# Altium PCB chess_module.PcbDoc
Units mil, origin at the board's own origin, x right, y up, seen from the top; angles counter-clockwise.
Board outline 5000 x 5000 mil, 2 copper layers (Top Layer, Bottom Layer); 52 components, 35 nets, 126 pads, 45 vias.
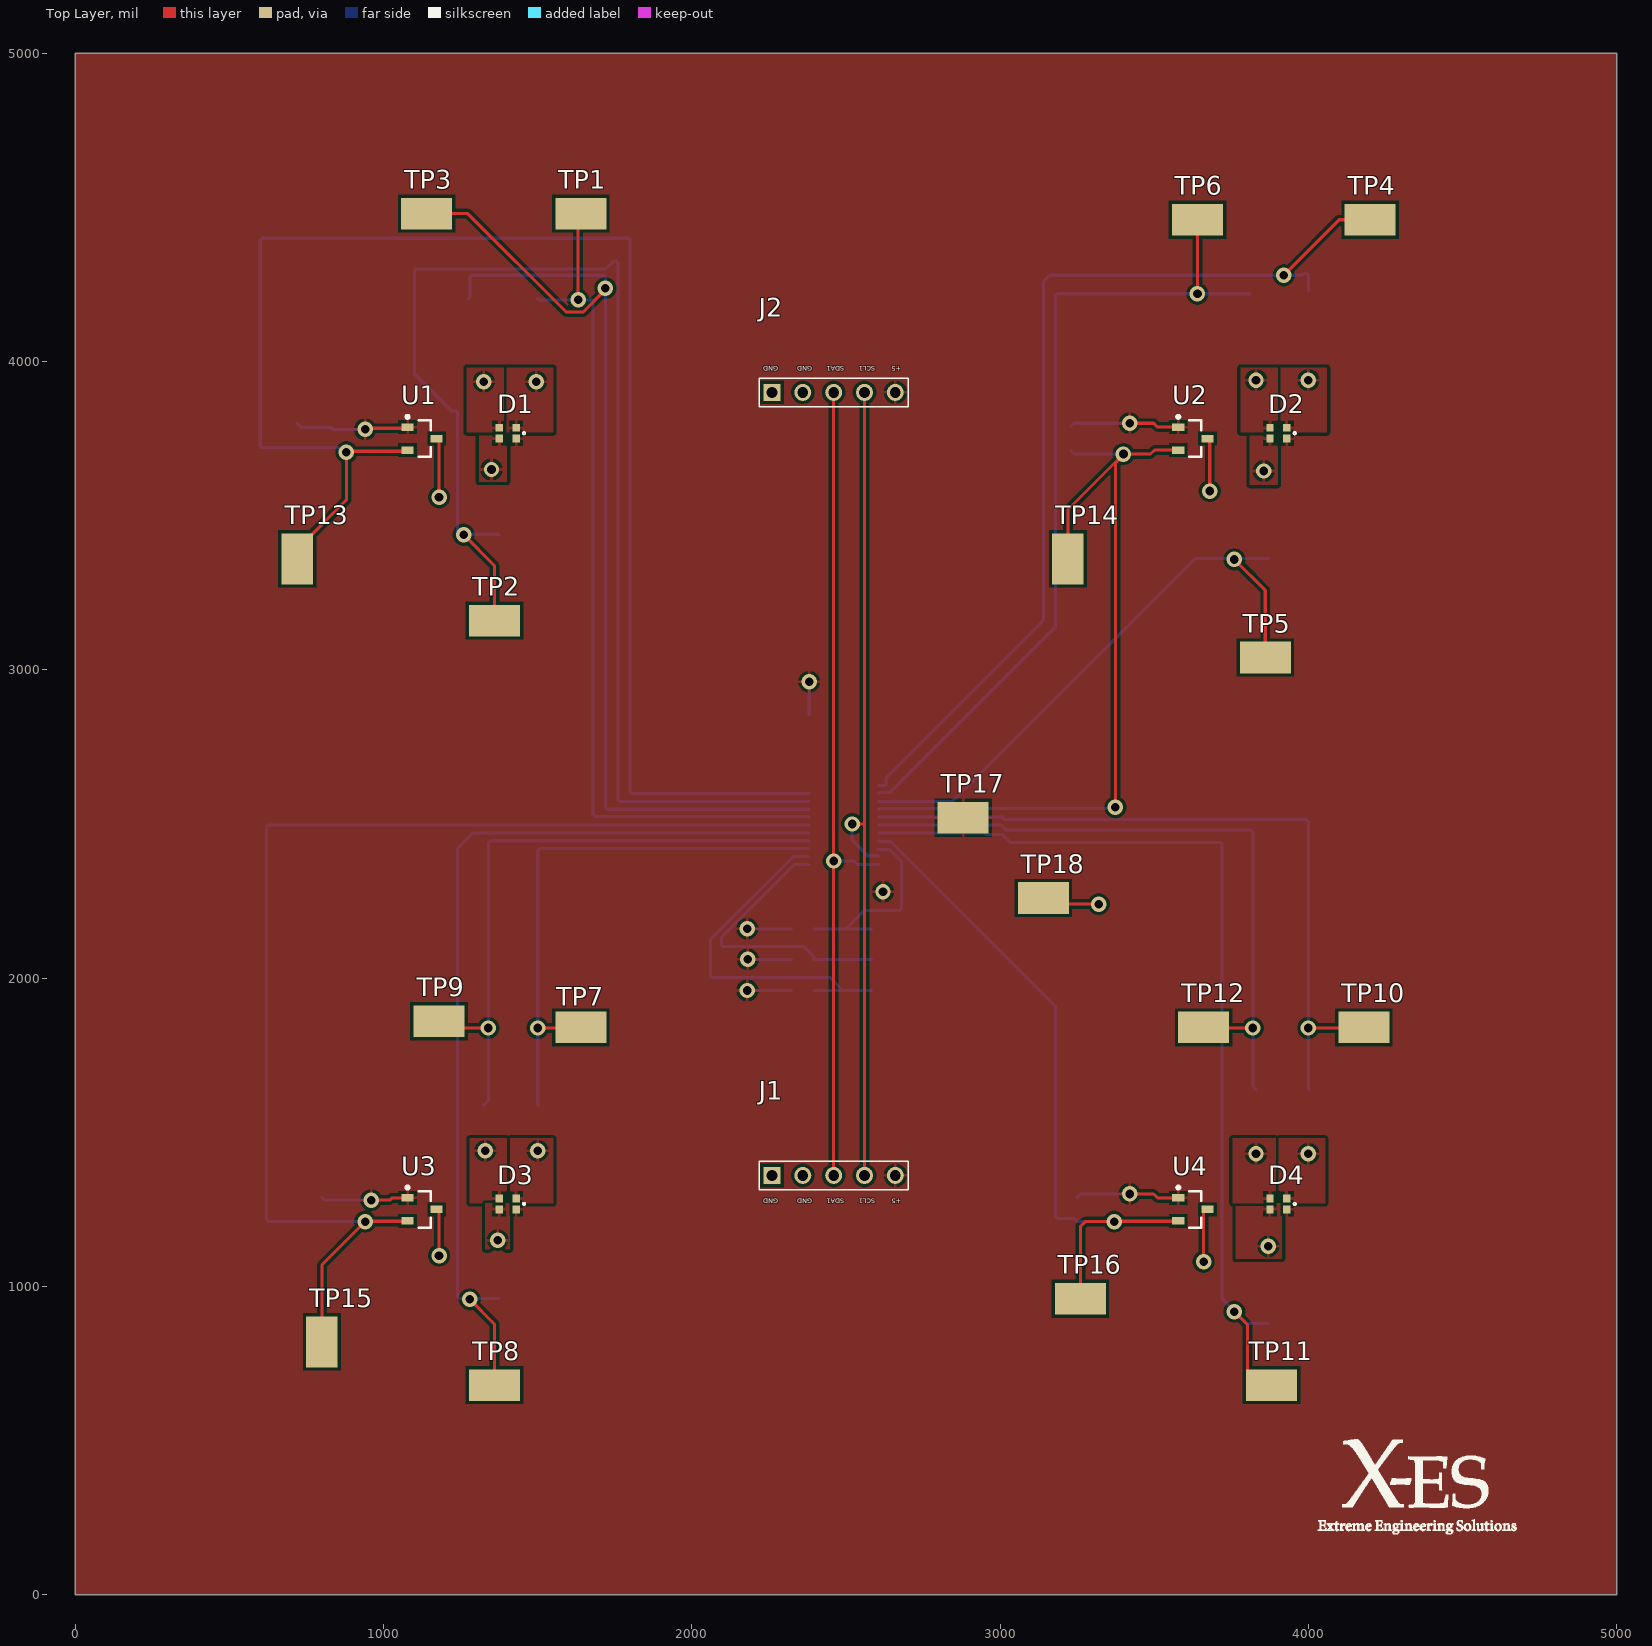
[diagram p0: Top Layer view]
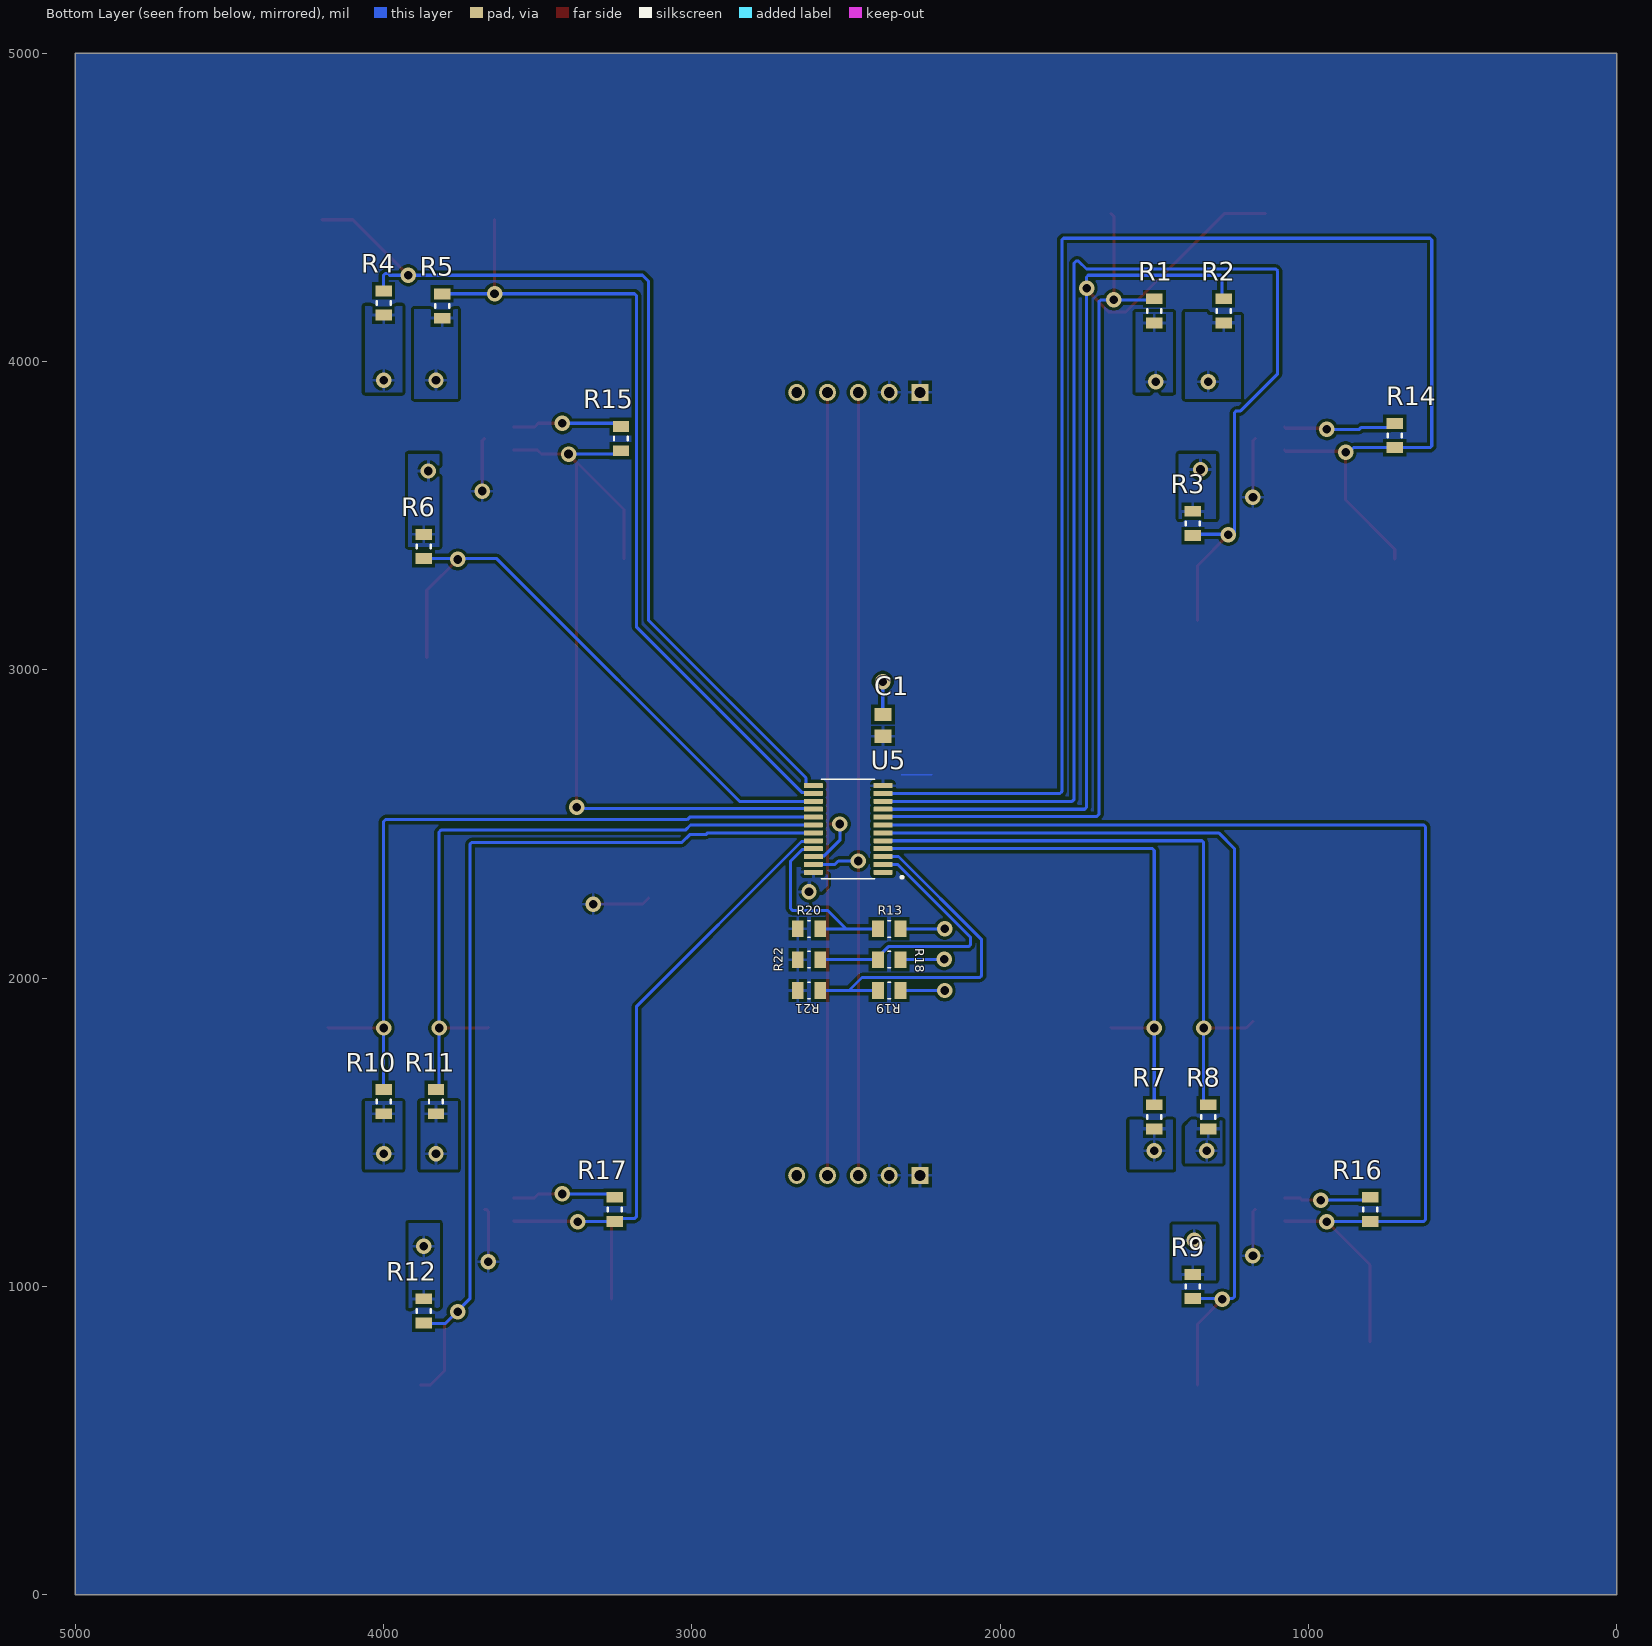
[diagram p1: Bottom Layer view, seen from below]
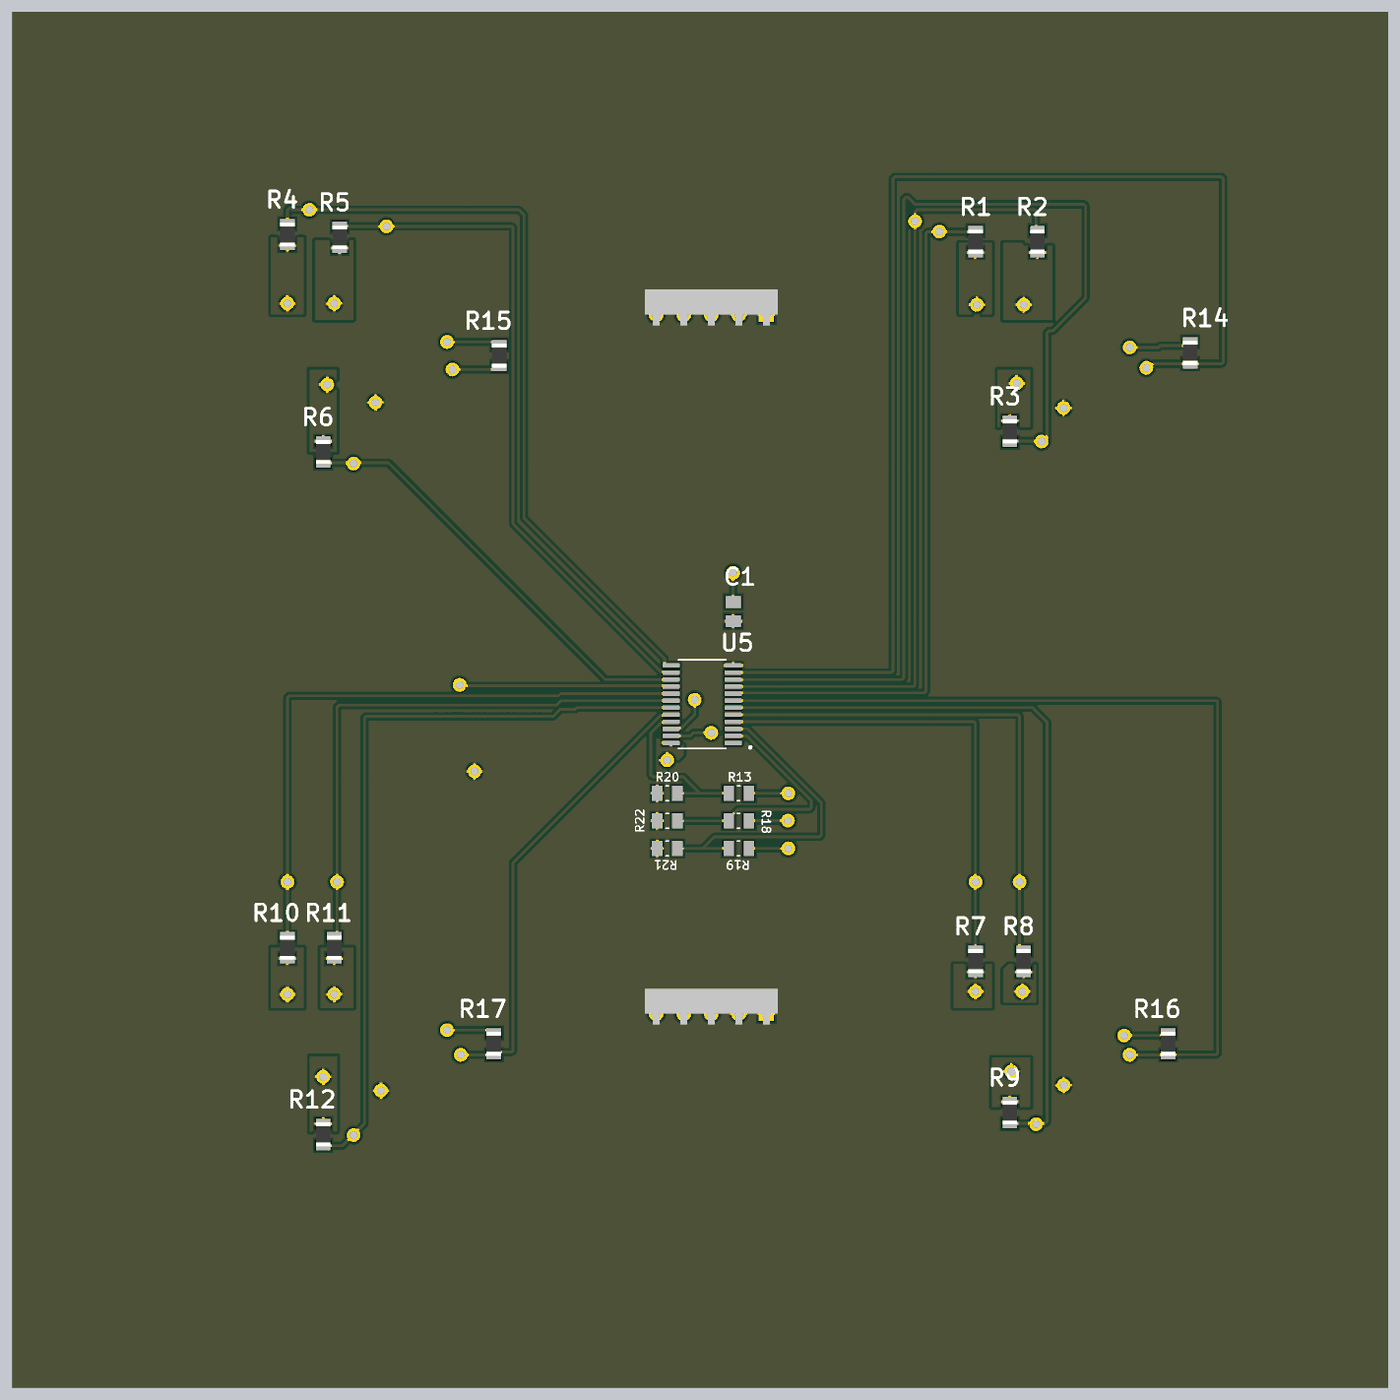
[diagram p2: 3D render of the assembled board from below, using the file's embedded part models]

## Layer stack, top to bottom
Top Solder: solder mask 0.4, Solder Resist, Dk 3.5
Top Layer: signal copper 1.4
Dielectric 1: dielectric 12.6, FR-4, Dk 4.8
Bottom Layer: signal copper 1.4
Bottom Solder: solder mask 0.4, Solder Resist, Dk 3.5

## Board outline
0,0 5000,0 5000,5000 0,5000

## Design rules (kind name [scope] priority, off if disabled: settings)
Clearance [All] p1: gap=10 ignorepadtopadclearanceinfootprint=TRUE except(0: Arc-Hole Track-Hole SMDPad-Hole THPad-Hole Via-Hole Fill-Hole Poly-Hole Region-Hole Text-Hole)
PolygonConnect [All] p1: connectstyle=Relief reliefconductorwidth=10 reliefentries=4 polygonreliefangle="90 Angle" airgapwidth=10
RoutingVias [All] p1: holewidth=28 width=50 viastyle="Through Hole" minholewidth=28 minwidth=50 maxholewidth=28 maxwidth=50
SolderMaskExpansion [All] p1: expansion=4 istentingtop=FALSE
Width [All] p1: maxlimit=10 minlimit=10 preferedwidth=10
30 further rules are at their usual default settings.

## Classes and differential pairs
component class chess_module_LEDs: D1 D2 D3 D4 R1 R2 R3 R4 R5 R6 R7 R8 R9 R10 R11 R12 TP1 TP2 TP3 TP4 TP5 TP6 TP7 TP8 TP9 TP10 TP11 TP12
component class chess_module_HEF: R14 R15 R16 R17 TP13 TP14 TP15 TP16 U1 U2 U3 U4
component class chess_module_connectors: C1 J1 J2 R13 R18 R19 R20 R21 R22 TP17 TP18 U5

## Components (designator, comment, footprint, x,y, rotation, side; value= is the part's Value field where it differs from the comment)
C1 "CL21A106KOQNNNG" CAPC2012X140N 2380,2820 r90 bottom
D1 "EAST1616RGBA2" EAST1616RGBA2 1375,3750 r0 top
D2 "EAST1616RGBA2" EAST1616RGBA2 3875,3750 r0 top
D3 "EAST1616RGBA2" EAST1616RGBA2 1375,1250 r0 top
D4 "EAST1616RGBA2" EAST1616RGBA2 3875,1250 r0 top
J1 "87224-5" TE_87224-5 2460,1360 r0 top
J2 "87224-5" TE_87224-5 2460,3900 r0 top
R1 "510" SMD-0805-RES 1500,4164.37 r270 bottom
R2 "243" SMD-0805-RES 1275,4164.37 r270 bottom
R3 "243" SMD-0805-RES 1375,3475 r270 bottom
R4 "510" SMD-0805-RES 4000,4190 r270 bottom
R5 "243" SMD-0805-RES 3810,4180 r270 bottom
R6 "243" SMD-0805-RES 3870,3400 r270 bottom
R7 "510" SMD-0805-RES 1500,1550 r270 bottom
R8 "243" SMD-0805-RES 1325,1550 r270 bottom
R9 "243" SMD-0805-RES 1375,1000 r270 bottom
R10 "510" SMD-0805-RES 4000,1599.37 r270 bottom
R11 "243" SMD-0805-RES 3830,1599.37 r270 bottom
R12 "243" SMD-0805-RES 3870,920.63 r270 bottom
R13 "RMCF0805ZT0R00" RESC2012X60N 2360,2160 r180 bottom
R14 "510" SMD-0805-RES 720,3760 r270 bottom
R15 "510" SMD-0805-RES 3230,3750 r270 bottom
R16 "510" SMD-0805-RES 800,1250 r270 bottom
R17 "510" SMD-0805-RES 3250,1250 r270 bottom
R18 "RMCF0805ZT0R00" RESC2012X60N 2360,2060 r180 bottom
R19 "RMCF0805ZT0R00" RESC2012X60N 2360,1960 r0 bottom
R20 "RMCF0805ZT0R00" RESC2012X60N 2620,2160 r0 bottom
R21 "RMCF0805ZT0R00" RESC2012X60N 2620,1960 r0 bottom
R22 "RMCF0805ZT0R00" RESC2012X60N 2620,2060 r0 bottom
TP1 "TP_1206" TP-SMC-1206 1640,4480 r0 top
TP2 "TP_1206" TP-SMC-1206 1360,3160 r0 top
TP3 "TP_1206" TP-SMC-1206 1140,4480 r0 top
TP4 "TP_1206" TP-SMC-1206 4200,4460 r0 top
TP5 "TP_1206" TP-SMC-1206 3860,3040 r0 top
TP6 "TP_1206" TP-SMC-1206 3640,4460 r0 top
TP7 "TP_1206" TP-SMC-1206 1640,1840 r0 top
TP8 "TP_1206" TP-SMC-1206 1360,680 r0 top
TP9 "TP_1206" TP-SMC-1206 1180,1860 r0 top
TP10 "TP_1206" TP-SMC-1206 4180,1840 r180 top
TP11 "TP_1206" TP-SMC-1206 3880,680 r0 top
TP12 "TP_1206" TP-SMC-1206 3660,1840 r180 top
TP13 "TP_1206" TP-SMC-1206 720,3360 r270 top
TP14 "TP_1206" TP-SMC-1206 3220,3360 r90 top
TP15 "TP_1206" TP-SMC-1206 800,820 r270 top
TP16 "TP_1206" TP-SMC-1206 3260,960 r180 top
TP17 "TP_1206" TP-SMC-1206 2880,2520 r180 top
TP18 "TP_1206" TP-SMC-1206 3140,2260 r180 top
U1 "TLV4961-1M" SOT95P245X110-3N 1125,3750 r0 top
U2 "TLV4961-1M" SOT95P245X110-3N 3625,3750 r0 top
U3 "TLV4961-1M" SOT95P245X110-3N 1125,1250 r0 top
U4 "TLV4961-1M" SOT95P245X110-3N 3625,1250 r0 top
U5 "TCA9535PWR" SOP65P640X120-24N 2492.99,2483.98 r0 bottom

## Footprints (in the part's own frame and the unit in brackets; to place one, negate y for a bottom-side part, rotate by r counter-clockwise, add the part's x,y. Pads: shape width x height; smd on the part's side, far side on the other; paste and mask are expansions set on the pad)
CAPC2012X140N [mm]
  rect 1.1x1.43 smd: 1(-0.888,0) 2(0.888,0)
EAST1616RGBA2 [mm] "EAST1616RGBA2 RBG LED"
  rect 0.6x0.65 smd: 1(1.4,0.9) 2(0,0.9) 3(1.4,0) 4(0,0)
  silkscreen extent 1.95,0.35 2.15,0.55
RESC2012X60N [mm]
  rect 0.97x1.38 smd: 1(-0.93,0) 2(0.93,0)
  silkscreen extent -0.12,-0.68 0.12,0.68
SMD-0805-RES [mm]
  rect 0.9x1.35 smd: 1(-1,0) 2(1,0)
  silkscreen extent -0.15,-0.58 0.15,0.58, body extent -1.1,-0.67 1.1,0.67, height 0.5
SOP65P640X120-24N [mm]
  rrect25% 1.57x0.41 smd: 1(-2.87,3.575) 2(-2.87,2.925) 3(-2.87,2.275) 4(-2.87,1.625) 5(-2.87,0.975) 6(-2.87,0.325) 7(-2.87,-0.325) 8(-2.87,-0.975) 9(-2.87,-1.625) 10(-2.87,-2.275) 11(-2.87,-2.925) 12(-2.87,-3.575) 13(2.87,-3.575) 14(2.87,-2.925) 15(2.87,-2.275) 16(2.87,-1.625) 17(2.87,-0.975) 18(2.87,-0.325) 19(2.87,0.325) 20(2.87,0.975) 21(2.87,1.625) 22(2.87,2.275) 23(2.87,2.925) 24(2.87,3.575)
  silkscreen extent -4.54,-4.1 2.2,4.1
SOT95P245X110-3N [mm] "SOT23, 3-Leads, Body 2.90x2.45mm, Pitch 0.95mm, IPC Medium Density"
  rect 1x0.6 smd: 1(-1.2,0.95) 2(-1.2,-0.95) 3(1.2,0)
  silkscreen extent -1.32,-1.5 0.7,1.92, body extent -0.7,-1.5 0.7,1.5, height 1.1
TE_87224-5 [mil]
  rect 55x55 hole 35: 1(-200,0)
  round 55 hole 35: 2(-100,0) 3(0,0) 4(100,0) 5(200,0)
  silkscreen extent -242,-46 242,46, body extent -242,-318 242,215, height 46
TP-SMC-1206 [mm]
  rect 4.2x2.6 smd mask+0: 1(0,0)
  body extent -1.57,-0.79 1.63,0.81, height 1.22

## Part data
C1: "10ÂµF Â±10% 16V Ceramic Capacitor X5R 0805 _2012 Metric_", Package="0805 Samsung", Digi-Key_Part_Number=1276-6455-1-ND, Digi-Key_Purchase_URL=https://www.digikey.com/product-detail/en/samsung-electro-mechanics/CL21A106KOQNNNG/1276-6455-1-ND/5958083?utm_source=snapeda&utm_medium=aggregator&utm_campaign=symbol, MF="Samsung Electro-Mechanics", MP=CL21A106KOQNNNG, SnapEDA_Link=https://www.snapeda.com/parts/CL21A106KOQNNNG/Samsung%20Electro-Mechanics/view-part/3597829/?ref=snap
J1 J2: "Conn Unshrouded Header HDR 5 POS 2.54mm Solder ST Thru-Hole", Package=None, Availability=Good, Centerline_Pitch="2.54 mm[.1 in]", EU_RoHS_Compliance=Compliant, MF="TE Connectivity", MP=87224-5, Number_of_Positions=5, Price=None, Product_Type=Connector, Purchase-URL=https://pricing.snapeda.com/search/part/87224-5/?ref=eda, SnapEDA_Link=https://www.snapeda.com/parts/87224-5/TE%20Connectivity%20AMP%20Connectors/view-part/1233389/?ref=snap
R1 R4 R7 R10 R14 R15 R16 R17: library part ERJ-6ENF5100V, "RES SMD 510 OHM 1% 1/8W 0805", Digi-Key Part Number=P510CCT-ND, Manufacturer="Panasonic Electronic Components", Operating Temperature="-55°C ~ 155°C", Package / Case="0805 (2012 Metric)", Power (Watts)="0.125W, 1/8W", Supplier Device Package=0805, Temperature Coefficient=±100ppm/°C, Tolerance=±1%, @ qty=1500, Composition="Thick Film", Datasheets=http://industrial.panasonic.com/www-cgi/jvcr13pz.cgi?E+PZ+3+AOA0002+ERJ6ENF5100V+7+WW, Factory Stock=0, Failure Rate=-, Features="Automotive AEC-Q200", Height - Seated (Max)="0.028\" (0.70mm)", Image=//media.digikey.com/Renders/Panasonic%20Renders/ERJ-0805%20Pkg.jpg, Minimum Quantity=1, Number of Terminations=2, Packaging="Cut Tape (CT)", Part Number=ERJ-6ENF5100V, Part Status=Active, Quantity Available=80206, Series=ERJ, Size / Dimension="0.079\" L x 0.049\" W (2.00mm x 1.25mm)", Unit Price (USD)=0.00729
R2 R3 R5 R6 R8 R9 R11 R12: library part ERJ-6ENF2430V, "RES SMD 243 OHM 1% 1/8W 0805", Digi-Key Part Number=P243CCT-ND, Manufacturer="Panasonic Electronic Components", Operating Temperature="-55°C ~ 155°C", Package / Case="0805 (2012 Metric)", Power (Watts)="0.125W, 1/8W", Supplier Device Package=0805, Temperature Coefficient=±100ppm/°C, Tolerance=±1%, @ qty=1500, Composition="Thick Film", Datasheets=http://industrial.panasonic.com/www-cgi/jvcr13pz.cgi?E+PZ+3+AOA0002+ERJ6ENF2430V+7+WW, Factory Stock=0, Failure Rate=-, Features="Automotive AEC-Q200", Height - Seated (Max)="0.028\" (0.70mm)", Image=//media.digikey.com/Renders/Panasonic%20Renders/ERJ-0805%20Pkg.jpg, Minimum Quantity=1, Number of Terminations=2, Packaging="Cut Tape (CT)", Part Number=ERJ-6ENF2430V, Part Status=Active, Quantity Available=46150, Series=ERJ, Size / Dimension="0.079\" L x 0.049\" W (2.00mm x 1.25mm)", Unit Price (USD)=0.00729
R13 R18 R19 R20 R21 R22: "0 Ohms Jumper 0.125W, 1/8W Chip Resistor 0805 (2012 Metric) Automotive AEC-Q200 Thick Film", Package="0805 Stackpole Electronics", Availability=Unavailable, DigiKey-Purchase-URL=https://snapeda.com/shop?store=DigiKey&id=492501, MF="Stackpole Electronics", MP=RMCF0805ZT0R00, Price=None, SnapEDA_Link=https://www.snapeda.com/parts/RMCF0805ZT0R00/Stackpole%20Electronics%20Inc/view-part/492501/?ref=snap
TP1 TP2 TP3 TP4 TP5 TP6 TP7 TP8 TP9 TP10 TP11 TP12 TP13 TP14 TP15 TP16 TP17 TP18: "Test Point SMD 1206", Case Size=1206, Manufacturer="TE Connectivity (Tyco Electronics)", Manufacturer Part Number=1625854-1, Operating Temperature="-55 to 125 C", Power Rating=N/R, Resistance Value="0 Ohm", Supplier Part Number=A106143CT-ND, ComponentLink1Description=https://datasheet.ciiva.com/6439/eng-ds-1773266-a-6439169.pdf, ComponentLink1URL=https://datasheet.ciiva.com/6439/eng-ds-1773266-a-6439169.pdf, ComponentLink2Description=https://datasheet.ciiva.com/30136/1773266-a-30136341.pdf, ComponentLink2URL=https://datasheet.ciiva.com/30136/1773266-a-30136341.pdf, ComponentLink3Description=https://datasheet.ciiva.com/6439/eng-ds-1773266-a-6439080.pdf, ComponentLink3URL=https://datasheet.ciiva.com/6439/eng-ds-1773266-a-6439080.pdf, ComponentLink4Description=https://datasheet.ciiva.com/6439/eng-ds-1773266-a-6439081.pdf, ComponentLink4URL=https://datasheet.ciiva.com/6439/eng-ds-1773266-a-6439081.pdf, ComponentLink5Description=https://datasheet.ciiva.com/6439/eng-ds-1773266-a-6439083.pdf, ComponentLink5URL=https://datasheet.ciiva.com/6439/eng-ds-1773266-a-6439083.pdf, Dimension="3.2 x 1.6 x 1.25mm", Family=RC, Mounting="Surface Mount", Packaging="Tape and Reel", Part No=1625854-1, Pricing 1="1=0.28, 10=0.261, 25=0.224, 50=0.1902, 100=0.1828, 250=0.1641, 500=0.1567, 1000=0.1306 (USD)", RoHS=Yes, Stock 1=31937, Supplier=Digi-Key, Temperature Coefficient=N/R, Terminal Pitch=N/R, Termination Style=N/R, Tolerance=N/R
U1 U2 U3 U4: "Hall Effect Sensor"
U5: "Remote 16-Bit I2C and SMBus, Low-Power I/O Expander With Interrupt Output and Config Registers 24-TSSOP -40 to 85", Package="TSSOP-24 Texas Instruments", Arrow_Electronics-Purchase-URL=https://snapeda.com/shop?store=Arrow+Electronics&id=1237891, Availability=Good, DigiKey-Purchase-URL=https://snapeda.com/shop?store=DigiKey&id=1237891, MF="Texas Instruments", Mouser-Purchase-URL=https://snapeda.com/shop?store=Mouser&id=1237891, MP=TCA9535PWR, Price=None, SnapEDA_Link=https://www.snapeda.com/parts/TCA9535PWR/Texas%20Instruments/view-part/1237891/?ref=snap, Texas_Instruments-Purchase-URL=https://snapeda.com/shop?store=Texas+Instruments&id=1237891

## Via types
v1: diameter 50, hole 28, Top Layer to Bottom Layer, 45 vias

## Nets (pads, with @x,y where several pads share a name; then routed paths per layer and width w, separated by ;. In a path a pad name is that pad's centre, name@x,y a point inside that pad or via, vN(x,y) a via of type N, cw(c..) or ccw(c..) an arc to the next point about the centre after c; other vN are vias at no path point)
+5: C1.2 D1.3 D2.3 D3.3 D4.3 J1.5 J2.5 R13.2 R14.1 R15.1 R16.1 R17.1 R18.2 R19.1 TP17.1 U1.1 U2.1 U3.1 U4.1 U5.24 | length 1883.8
  Top Layer w10: v1(940,3780) 943.7,3783.7 1074.06,3783.7 U1.1 ; v1(960,1280) 1020.48,1280 1027.88,1287.4 U3.1 ; v1(3420,1300) 3497.88,1300 3510.48,1287.4 U4.1 ; v1(3420,3800) 3497.88,3800 3510.48,3787.4 U2.1
  Bottom Layer w10: R14.1 732.72,3786.65 828.22,3786.65 834.88,3780 v1(940,3780) ; R16.1 809.37,1280 v1(960,1280) ; v1(2180,1960) R19.1 ; v1(2180,2160) R13.2 ; v1(2181.61,2060.75) 2322.63,2060.75 R18.2 ; C1.2 2380.76,2855.72 v1(2380.76,2961.33) ; R15.1 3240.63,3800 v1(3420,3800) ; R17.1 3260.63,1300 v1(3420,1300)
  other v1: 2620,2280
A0: R13.1 R20.1 U5.21 | length 639.9
  Bottom Layer w10: R13.1 2500,2160 ; R20.1 2500,2160 ; U5.21@2603.46,2417.48 2641.92,2417.48 2680,2379.4 2680,2225.86 2674.14,2220 2560,2220 2500,2160
A1: R18.1 R22.1 U5.2 | length 918
  Bottom Layer w10: U5.2 2332.25,2368.82 2096.31,2132.88 2096.31,2108.02 2102.17,2102.17 2362.52,2102.17 2396.61,2068.07 R18.1 R22.1
A2: R19.2 R21.1 U5.3 | length 1185.1
  Bottom Layer w10: U5.3 2329.56,2394.41 2060,2124.85 2060,2008.02 2065.86,2002.17 2447.83,2002.17 2490,1960 ; R19.2 2490,1960 ; R21.1 2490,1960
BD1: D1.4 R3.1
  other v1: 1350,3650
BD1_OUT: R3.2 TP2.1 U5.10 | length 4411.8
  Top Layer w10: v1(1259.57,3438.14) 1360,3337.72 TP2.1
  Bottom Layer w10: R3.2 1370.63,3440 1245.86,3440 1240,3445.86 1240,3834.14 1234.14,3840 1220,3840 1100,3960 1100,4294.14 1105.86,4300 1720,4300 1745.86,4325.86 1754.14,4325.86 1760,4320 1760,2580 1766.46,2573.54 U5.10
BD2: D2.4 R6.1
  other v1: 3855,3645
BD2_OUT: R6.2 TP5.1 U5.15 | length 1949.8
  Top Layer w10: v1(3759.57,3358.14) 3860,3257.72 TP5.1
  Bottom Layer w10: U5.15 2845.35,2573.54 3632.44,3360.63 R6.2
BD3: D3.4 R9.1
  other v1: 1370,1150
BD3_OUT: R9.2 TP8.1 U5.6 | length 3063.6
  Top Layer w10: v1(1279.57,958.14) 1360,877.72 TP8.1
  Bottom Layer w10: R9.2 1245.86,960.63 1240,966.49 1240,2420 1291.18,2471.18 U5.6
BD4: D4.4 R12.1
  other v1: 3870,1130
BD4_OUT: R12.2 TP11.1 U5.19 | length 3091.9
  Top Layer w10: v1(3759.57,918.14) 3802.32,875.4 3802.32,726.18 3848.5,680 TP11.1
  Bottom Layer w10: U5.19 2948.82,2471.18 2954.41,2465.59 3007.23,2465.59 3032.82,2440 3714.14,2440 3720,2434.14 3720,960 3800,880 R12.2@3868.74,880
GD1: D1.2 R2.2
  other v1: 1325,3935
GD1_OUT: R2.1 TP3.1 U5.9 | length 3647.1
  Top Layer w10: TP3.1 1273.16,4480 1592.29,4160.87 1647.77,4160.87 1719.57,4232.67 v1(1719.57,4238.14)
  Bottom Layer w10: R2.1 1280,4208.74 1280,4274.14 1285.86,4280 1714.14,4280 1720,4274.14 1720,2553.81 1725.86,2547.95 U5.9
GD2: D2.2 R5.2
  other v1: 3830,3940
GD2_OUT: R5.1 TP6.1 U5.14 | length 2745
  Top Layer w10: v1(3640,4220) TP6.1
  Bottom Layer w10: U5.14 2608.5,2601.65 2641.92,2601.65 3180,3139.73 3180,4214.14 3185.86,4220 v1(3640,4220) 3809.37,4220 R5.1
GD3: D3.2 R8.2
  other v1: 1330,1440
GD3_OUT: R8.1 TP9.1 U5.5 | length 2069
  Top Layer w10: TP9.1 1201.86,1838.14 v1(1339.57,1838.14)
  Bottom Layer w10: R8.1 1327.28,1589.37 1340,1602.09 1340,2439.73 1345.86,2445.59 U5.5
GD4: D4.2 R11.2
  other v1: 3830,1430
GD4_OUT: R11.1 TP12.1 U5.18 | length 2223.3
  Top Layer w10: TP12.1 3661.86,1838.14 v1(3819.57,1838.14)
  Bottom Layer w10: U5.18 3004.33,2496.77 3021.1,2480 3814.14,2480 3820,2474.14 3820,1648.74 R11.1
GND: C1.1 J1.1 J1.2 J2.1 J2.2 R20.2 R21.2 R22.2 TP18.1 U1.3 U2.3 U3.3 U4.3 U5.12 | length 887.8
  Top Layer w10: U3.3 1173.19,1250 1180,1243.19 v1(1180,1100) ; U1.3 1173.19,3750 1180,3743.19 v1(1180,3560) ; TP18.1 3160,2240 v1(3320,2240) ; v1(3660,1080) 3660,1243.19 3666.81,1250 U4.3 ; U2.3 3673.19,3750 3680,3743.19 v1(3680,3580)
HEF1_OUT: R14.2 TP13.1 U1.2 U5.11 | length 5145.1
  Top Layer w10: TP13.1 720,3391.5 879.41,3550.9 v1(879.41,3705.8) 882.8,3709.2 1074.36,3709.2 U1.2
  Bottom Layer w10: v1(879.41,3705.8) 868.58,3705.8 853.75,3720.63 R14.2 605.86,3720.63 600,3726.49 600,4394.14 605.86,4400 1794.14,4400 1800,4394.14 1800,2604.99 1805.86,2599.13 U5.11
HEF2_OUT: R15.2 TP14.1 U2.2 U5.16 | length 2699.2
  Top Layer w10: TP14.1 3220,3520 v1(3400,3700) ; v1(3373.98,2553.98) 3373.98,3669.46 3400,3695.48 v1(3400,3700) ; U2.2 3500.48,3712.6 3487.88,3700 v1(3400,3700)
  Bottom Layer w10: U5.16 2608.5,2550.47 3370.47,2550.47 v1(3373.98,2553.98) ; R15.2 3240.63,3700 v1(3400,3700)
HEF3_OUT: R16.2 TP15.1 U3.2 U5.7 | length 3946.4
  Top Layer w10: TP15.1 800,1070 v1(940,1210) 941.3,1211.3 1076.46,1211.3 U3.2
  Bottom Layer w10: v1(940,1210) 800.63,1210 R16.2 625.86,1210.63 620,1216.49 620,2490.91 625.86,2496.77 U5.7
HEF4_OUT: R17.2 TP16.1 U4.2 U5.20 | length 2234.8
  Top Layer w10: TP16.1 3260,1194.14 3275.86,1210 v1(3370,1210) 3371.3,1211.3 3576.46,1211.3 U4.2
  Bottom Layer w10: U5.20 2608.5,2443.07 2644.61,2443.07 3180,1907.69 3180,1225.86 3185.86,1220 3240.63,1220 R17.2 3250.63,1210 v1(3370,1210)
I2C_SCL: J1.4 J2.4 U5.22 | length 2740.8
  Top Layer w10: v1(2520,2500) 2560,2500 ; J1.4 2560,2500 ; J2.4 2560,2500
  Bottom Layer w10: v1(2520,2500) 2520,2446.98 2570.05,2396.93 2603.46,2396.93 U5.22
I2C_SDA: J1.3 J2.3 U5.23 | length 2690.6
  Top Layer w10: J1.3 v1(2460,2380) J2.3
  Bottom Layer w10: v1(2460,2380) 2524.95,2380 2536.13,2368.82 U5.23
RD1: D1.1 R1.2
  other v1: 1495,3935
RD1_OUT: R1.1 TP1.1 U5.8 | length 2833.6
  Top Layer w10: v1(1631.2,4200.87) 1631.2,4471.2 TP1.1
  Bottom Layer w10: R1.1 1503.74,4200 1674,4200 1679.86,4194.14 1679.86,2530.74 1685.72,2524.88 2377.48,2524.88 U5.8
RD2: D2.1 R4.2
  other v1: 4000,3940
RD2_OUT: R4.1 TP4.1 U5.13 | length 3147
  Top Layer w10: v1(3920,4280) 4100,4460 TP4.1
  Bottom Layer w10: U5.13 2626.8,2624.72 2629.87,2627.8 2629.87,2649.87 3140,3160 3140,4260 3160,4280 v1(3920,4280) 3980,4280 3985.86,4285.86 3994.14,4285.86 4000,4280 R4.1
RD3: D3.1 R7.2
  other v1: 1500,1440
RD3_OUT: R7.1 TP7.1 U5.4 | length 1848.4
  Top Layer w10: v1(1499.57,1838.14) 1638.14,1838.14 TP7.1
  Bottom Layer w10: R7.1 1500,2414.14 1505.86,2420 U5.4
RD4: D4.1 R10.2
  other v1: 4000,1430
RD4_OUT: R10.1 TP10.1 U5.17 | length 2450.4
  Top Layer w10: v1(3999.57,1838.14) 4178.14,1838.14 TP10.1
  Bottom Layer w10: U5.17 3007.02,2522.36 3015.41,2513.98 3993.98,2513.98 4000,2507.95 R10.1
pads on no net: U5.1

## Polygon pours and split planes (outlines as drawn)
+5 on Top Layer "+5_L01_P053" (solid, pour order 53): 0,5000 5000,5000 5000,0 0,0
BD4 on Top Layer "BD4_L01_P011" (solid, pour order 11): 3764.04,1090 3914.04,1090 3914.04,1270 3764.04,1270
GD4 on Top Layer "GD4_L01_P010" (solid, pour order 10): 3754.04,1270 3904.04,1270 3904.04,1480 3754.04,1480
RD4 on Top Layer "RD4_L01_P009" (solid, pour order 9): 3904.04,1270 4054.04,1270 4054.04,1480 3904.04,1480
BD2 on Top Layer "BD2_L01_P008" (solid, pour order 8): 3900,3770 3900,3600 3810,3600 3810,3770
GD2 on Top Layer "GD2_L01_P007" (solid, pour order 7): 3900,3770 3780,3770 3780,3980 3900,3980
RD2 on Top Layer "RD2_L01_P006" (solid, pour order 6): 3910,3770 4060,3770 4060,3980 3910,3980
BD1 on Top Layer "BD1_L01_P005" (solid, pour order 5): 1400,3770 1400,3610 1310,3610 1310,3770
GD1 on Top Layer "GD1_L01_P004" (solid, pour order 4): 1390,3770 1270,3770 1270,3980 1390,3980
RD1 on Top Layer "RD1_L01_P003" (solid, pour order 3): 1400,3770 1550,3770 1550,3980 1400,3980
RD3 on Top Layer "RD3_L01_P002" (solid, pour order 2): 1400,1270 1550,1270 1550,1480 1400,1480
GD3 on Top Layer "GD3_L01_P001" (solid, pour order 1): 1400,1270 1280,1270 1280,1480 1400,1480
BD3 on Top Layer "BD3_L01_P000" (solid, pour order 0): 1410,1270 1410,1120 1330,1120 1330,1270
GND on Bottom Layer "GND_L02_P054" (solid, pour order 54): 0,5000 5000,5000 5000,0 0,0
+5 on Bottom Layer "+5_L02_P045" (solid, pour order 45): 2560,2360 2660,2360 2660,2220 2640,2220 2560,2300
no net on Bottom Layer "NONET_L02_P044" (solid, pour order 44): 2220,2660 2320,2660 2260,2660
BD2 on Bottom Layer "BD2_L02_P030" (solid, pour order 30): 3820,3400 3920,3400 3920,3700 3820,3700
GD4 on Bottom Layer "GD4_L02_P040" (solid, pour order 40): 3760,1600 3880,1600 3880,1380 3760,1380
RD4 on Bottom Layer "RD4_L02_P039" (solid, pour order 39): 3940,1600 4060,1600 4060,1380 3940,1380
BD4 on Bottom Layer "BD4_L02_P038" (solid, pour order 38): 3818.46,920 3918.46,920 3918.46,1205.07 3818.46,1205.07
RD2 on Bottom Layer "RD2_L02_P032" (solid, pour order 32): 3940,4180 4060,4180 4060,3900 3940,3900
GD2 on Bottom Layer "GD2_L02_P031" (solid, pour order 31): 3760,4180 3900,4180 3900,3880 3760,3880
BD3 on Bottom Layer "BD3_L02_P023" (solid, pour order 23): 1300,1020 1440,1020 1440,1200 1300,1200
RD3 on Bottom Layer "RD3_L02_P022" (solid, pour order 22): 1440,1540 1580,1540 1580,1380 1440,1380
GD3 on Bottom Layer "GD3_L02_P021" (solid, pour order 21): 1380,1540 1400,1520 1400,1400 1280,1400 1280,1540
BD1 on Bottom Layer "BD1_L02_P017" (solid, pour order 17): 1420,3480 1420,3700 1300,3700 1300,3480
RD1 on Bottom Layer "RD1_L02_P014" (solid, pour order 14): 1560,4160 1560,3900 1440,3900 1440,4160
GD1 on Bottom Layer "GD1_L02_P013" (solid, pour order 13): 1220,4160 1400,4160 1400,3880 1220,3880

## Silkscreen, mask and mechanical layers (free items; w line width, h text height)
Top Overlay:
  drawing of 2014 lines, arcs and shapes, not listed
  text "GND" at 2279.72,3985.02 h15 r180
  text "GND" at 2389.72,3985.02 h15 r180
  text "SDA1" at 2494.72,3985.02 h15 r180
  text "SCL1" at 2594.72,3985.02 h15 r180
  text "+5" at 2679.72,3985.02 h15 r180
  text "GND" at 2279.72,1285.02 h15 r180
  text "GND" at 2389.72,1285.02 h15 r180
  text "SDA1" at 2494.72,1285.02 h15 r180
  text "SCL1" at 2594.72,1285.02 h15 r180
  text "+5" at 2679.72,1285.02 h15 r180